# EAGLE board ADE7763 (EAGLE 7.2.0)
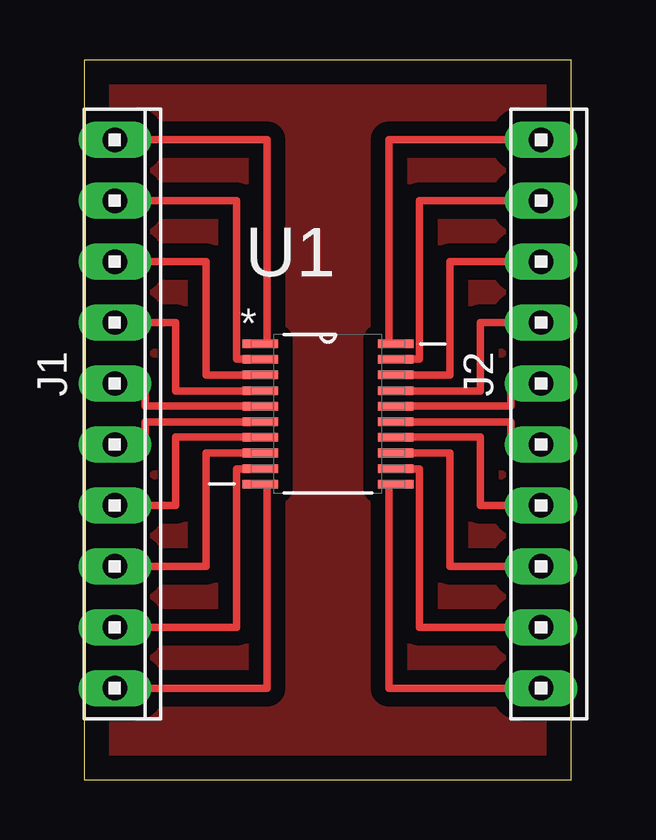
[diagram p0: board, top side]

Size 20.3 x 30 mm. Coordinates in mm from the lower left corner, seen from the top.
Outline: 0,0 20.3,0 20.3,30 0,30 0,0
Copper layers (1*16): Top 0.035mm / dielectric 1.5mm / Bottom 0.035mm
Design rules "default": minimum track width 10mil, minimum drill 24mil, track to track 8mil, track to pad 8mil, pad to pad 8mil, via to via 8mil, smd to smd 8mil, copper to edge 40mil, drill to drill 8mil, minimum pad ring 10mil, minimum via ring 8mil, stop-mask expansion 4mil, vias tented up to drill 0mil, thermal gap 10mil

## Footprints (pad centres in the part's own frame; a part is rotated, then mirrored left to right if it is on the bottom)
10X10MTA = drill 1.016 long: 1 11.43,0; 2 8.89,0; 3 6.35,0; 4 3.81,0; 5 1.27,0; 6 -1.27,0; 7 -3.81,0; 8 -6.35,0; 9 -8.89,0; 10 -11.43,0
SOP65P640X120-20N = smd 1.473 x 0.356: 1 -2.819,2.921; 2 -2.819,2.286; 3 -2.819,1.626; 4 -2.819,0.965; 5 -2.819,0.33; 6 -2.819,-0.33; 7 -2.819,-0.965; 8 -2.819,-1.626; 9 -2.819,-2.286; 10 -2.819,-2.921; 11 2.819,-2.921; 12 2.819,-2.286; 13 2.819,-1.626; 14 2.819,-0.965; 15 2.819,-0.33; 16 2.819,0.33; 17 2.819,0.965; 18 2.819,1.626; 19 2.819,2.286; 20 2.819,2.921

## Placement (x,y rotation side)
J1  [10X10MTA]  1.27,15.24 270 top
J2  [10X10MTA]  19.05,15.24 270 top
U1  ADE7763ARSZ  [SOP65P640X120-20N]  10.16,15.24 0 top

## Library data of the parts
J1 J2 = con-amp
U1 = ADE7763; MPN: ADE7763ARSZ; OC_FARNELL: 1701155; OC_NEWARK: 59K1002; PACKAGE: TSSOP-20; SUPPLIER: Analog Devices

## Nets
N$1: J1.10 U1.1
N$2: J1.9 U1.2
N$3: J1.8 U1.3
N$4: J1.7 U1.4
N$5: J1.6 U1.5
N$6: J1.5 U1.6
N$7: J1.4 U1.7
N$8: J1.3 U1.8
N$9: J1.2 U1.9
N$10: J1.1 U1.10
N$11: J2.1 U1.11
N$12: J2.2 U1.12
N$13: J2.3 U1.13
N$14: J2.4 U1.14
N$15: J2.5 U1.15
N$16: J2.6 U1.16
N$17: J2.7 U1.17
N$18: J2.8 U1.18
N$19: J2.9 U1.19
N$20: J2.10 U1.20

## Tracks (layer width: path | path; a pad name or v marks a point on that pad's centre or on a via)
N$1
  Top 0.305: U1.1 7.62,18.16 7.62,26.67 J1.10
N$2
  Top 0.305: U1.2 6.35,17.53 6.35,24.13 J1.9
N$3
  Top 0.305: U1.3 5.08,16.87 5.08,21.59 J1.8
N$4
  Top 0.305: U1.4 3.81,16.2 3.81,19.05 J1.7
N$5
  Top 0.305: U1.5 2.54,15.57 2.54,16.51 J1.6
N$6
  Top 0.305: U1.6 2.54,14.91 2.54,13.97 J1.5
N$7
  Top 0.305: U1.7 3.81,14.28 3.81,11.43 J1.4
N$8
  Top 0.305: U1.8 5.08,13.61 5.08,8.89 J1.3
N$9
  Top 0.305: U1.9 6.35,12.95 6.35,6.35 J1.2
N$10
  Top 0.305: U1.10 7.62,12.32 7.62,3.81 J1.1
N$11
  Top 0.305: U1.11 12.7,12.32 12.7,3.81 J2.1
N$12
  Top 0.305: U1.12 13.97,12.95 13.97,6.35 J2.2
N$13
  Top 0.305: U1.13 15.24,13.61 15.24,8.89 J2.3
N$14
  Top 0.305: U1.14 16.51,14.28 16.51,11.43 J2.4
N$15
  Top 0.305: U1.15 17.78,14.91 17.78,13.97 J2.5
N$16
  Top 0.305: U1.16 17.78,15.57 17.78,16.51 J2.6
N$17
  Top 0.305: U1.17 16.51,16.2 16.51,19.05 J2.7
N$18
  Top 0.305: U1.18 15.24,16.87 15.24,21.59 J2.8
N$19
  Top 0.305: U1.19 13.97,17.53 13.97,24.13 J2.9
N$20
  Top 0.305: U1.20 12.7,18.16 12.7,26.67 J2.10
N$21
  pour Top (isolate 0.61): 0,0 20.32,0 20.32,30.48 0,30.48